# Altium PCB MIDI_Synthesizer_PCB.PcbDoc
Units mil, origin at the board's own origin, x right, y up, seen from the top; angles counter-clockwise.
Board outline 6000 x 4000 mil, 2 copper layers (Top Layer, Bottom Layer); 242 components, 179 nets, 744 pads, 0 vias.
Unrouted connection lines stored in the file: 38.
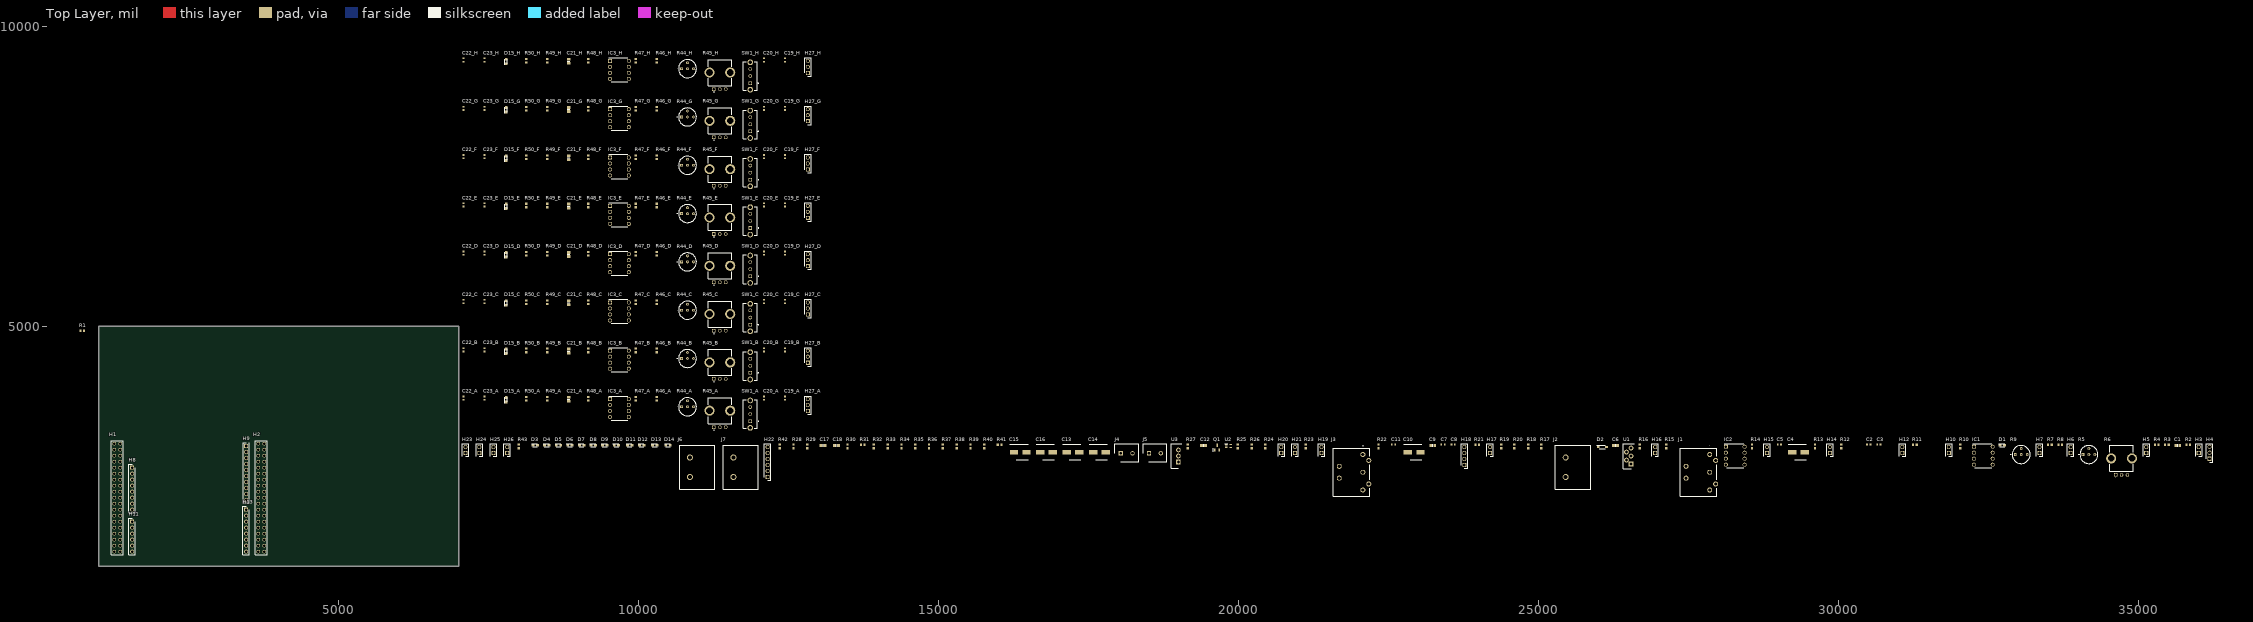
[diagram p0: Top Layer view]
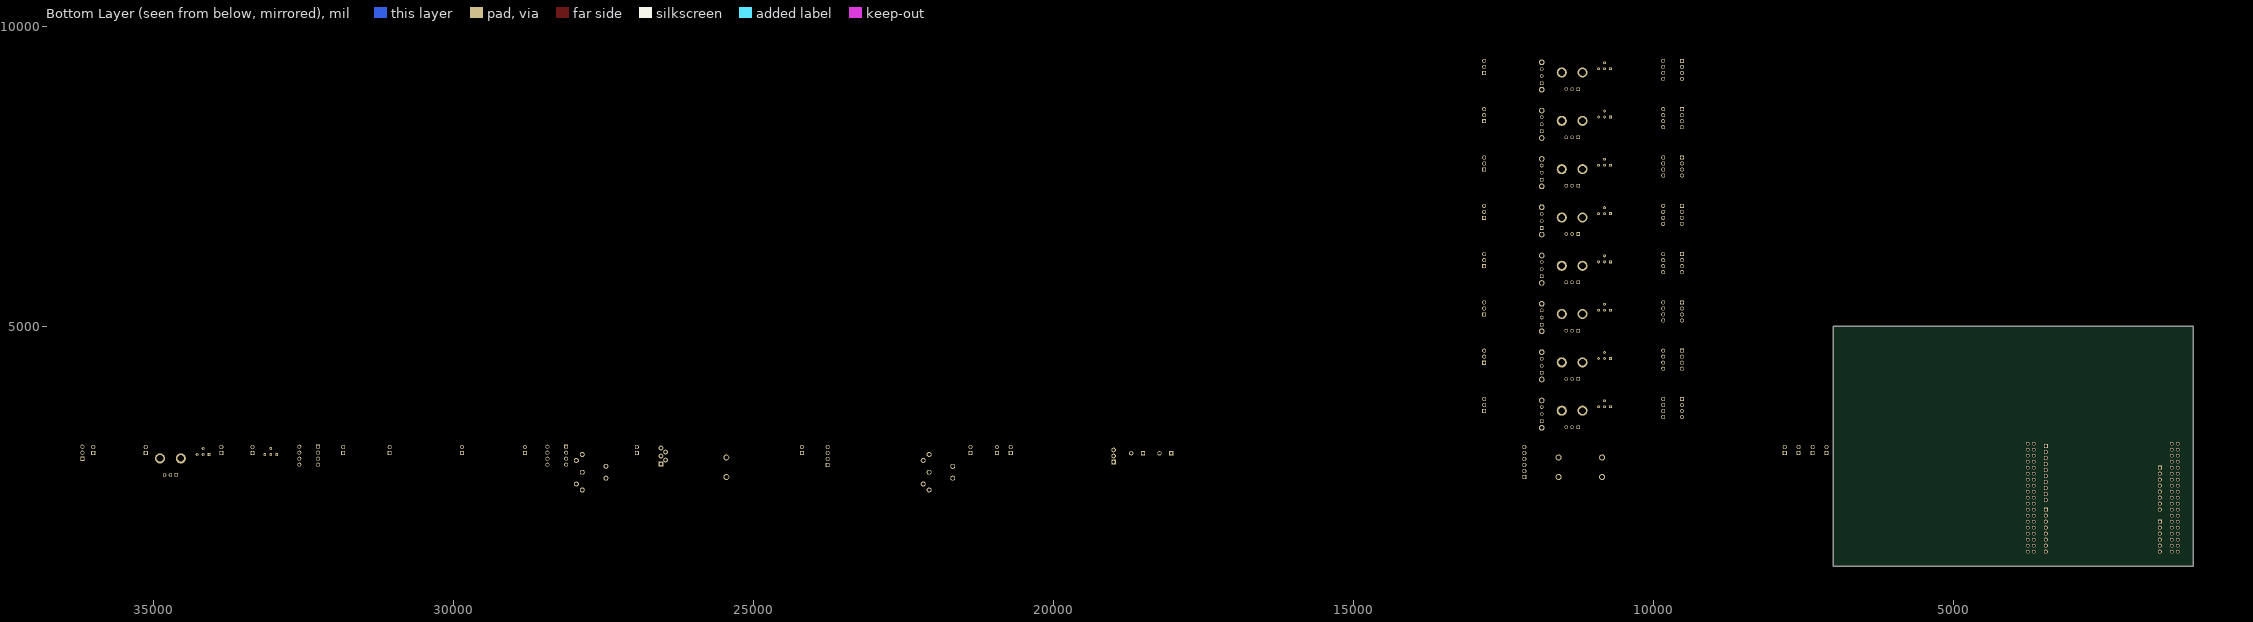
[diagram p1: Bottom Layer view, seen from below]

## Layer stack, top to bottom
Top Solder: solder mask 0.4, Solder Resist, Dk 3.5
Top Layer: signal copper 1.4
Dielectric 1: dielectric 12.6, FR-4, Dk 4.8
Bottom Layer: signal copper 1.4
Bottom Solder: solder mask 0.4, Solder Resist, Dk 3.5

## Board outline
1000,1000 7000,1000 7000,5000 1000,5000

## Design rules (kind name [scope] priority, off if disabled: settings)
Clearance [All] p1: gap=10 ignorepadtopadclearanceinfootprint=FALSE
PolygonConnect [All] p1: connectstyle=Relief reliefconductorwidth=10 reliefentries=4 polygonreliefangle="90 Angle" airgapwidth=10
RoutingVias [All] p1: holewidth=28 width=50 viastyle="Through Hole" minholewidth=28 minwidth=50 maxholewidth=28 maxwidth=50
SolderMaskExpansion [All] p1: expansion=4 istentingtop=FALSE
SupplyNets "Schematic Supply Nets_12" [InNet('3V3')] p1: voltage=0.000
SupplyNets "Schematic Supply Nets_11" [InNet('VBAT')] p2: voltage=0.000
SupplyNets "Schematic Supply Nets_10" [InNet('5V')] p3: voltage=0.000
SupplyNets "Schematic Supply Nets_9" [InNet('VIN')] p4: voltage=0.000
SupplyNets "Schematic Supply Nets_8" [InNet('AVDD')] p5: voltage=0.000
SupplyNets "Schematic Supply Nets_7" [InNet('AGND')] p6: voltage=0.000
SupplyNets "Schematic Supply Nets_6" [InNet('GND')] p7: voltage=0.000
SupplyNets "Schematic Supply Nets_5" [InNet('VBUS_STLK')] p8: voltage=0.000
SupplyNets "Schematic Supply Nets_4" [InNet('IOREF')] p9: voltage=0.000
SupplyNets "Schematic Supply Nets_3" [InNet('-15')] p10: voltage=0.000
SupplyNets "Schematic Supply Nets_2" [InNet('+15')] p11: voltage=0.000
SupplyNets "Schematic Supply Nets_1" [InNet('E5V')] p12: voltage=0.000
SupplyNets "Schematic Supply Nets" [InNet('VDD')] p13: voltage=0.000
Width [All] p1: maxlimit=10 minlimit=10 preferedwidth=10
30 further rules are at their usual default settings.

## Classes and differential pairs
component class H: C19_H C20_H C21_H C22_H C23_H D15_H H27_H IC3_H R44_H R45_H R46_H R47_H R48_H R49_H R50_H SW1_H
component class G: C19_G C20_G C21_G C22_G C23_G D15_G H27_G IC3_G R44_G R45_G R46_G R47_G R48_G R49_G R50_G SW1_G
component class F: C19_F C20_F C21_F C22_F C23_F D15_F H27_F IC3_F R44_F R45_F R46_F R47_F R48_F R49_F R50_F SW1_F
component class E: C19_E C20_E C21_E C22_E C23_E D15_E H27_E IC3_E R44_E R45_E R46_E R47_E R48_E R49_E R50_E SW1_E
component class D: C19_D C20_D C21_D C22_D C23_D D15_D H27_D IC3_D R44_D R45_D R46_D R47_D R48_D R49_D R50_D SW1_D
component class C: C19_C C20_C C21_C C22_C C23_C D15_C H27_C IC3_C R44_C R45_C R46_C R47_C R48_C R49_C R50_C SW1_C
component class B: C19_B C20_B C21_B C22_B C23_B D15_B H27_B IC3_B R44_B R45_B R46_B R47_B R48_B R49_B R50_B SW1_B
component class A: C19_A C20_A C21_A C22_A C23_A D15_A H27_A IC3_A R44_A R45_A R46_A R47_A R48_A R49_A R50_A SW1_A
channel class Low_Pass_Filter: A B C D E F G H
component class MIDI_Synthesizer: C1 C2 C3 C4 C5 C6 C7 C8 C9 C10 C11 C12 C13 C14 C15 C16 C17 C18 D1 D2 D3 D4 D5 D6 D7 D8 D9 D10 D11 D12 D13 D14 H1 H2 H3 H4 H5 H6 H7 H8 H9 H10 H11 H12 H13 H14 H15 H16 H17 H18 H19 H20 H21 H22 H23 H24 H25 H26 IC1 IC2 J1 J2 J3 J4 J5 J6 J7 Q1 R1 R2 R3 R4 R5 R6 R7 R8 R9 R10 R11 R12 R13 R14 R15 R16 R17 R18 R19 R20 R21 R22 R23 R24 R25 R26 R27 R28 R29 R30 R31 R32 R33 R34 R35 R36 R37 R38 R39 R40 R41 R42 R43 U1 U2 U3

## Components (designator, comment, footprint, x,y, rotation, side; value= is the part's Value field where it differs from the comment)
C1 "1u" CAP0805 35650,3010 r0 top
C2 "100n" CAP0603 30500,3025 r0 top
C3 "100n" CAP0603 30670,3025 r0 top
C4 "100u" CAPSMD660X800N 29330,2900 r0 top
C5 "100n" CAP0603 29010,3025 r0 top
C6 "2.2u" CAP0805 26280,3010 r0 top
C7 "100n" CAP0603 23405,3025 r0 top
C8 "100n" CAP0603 23575,3025 r0 top
C9 "0.22u" CAP0805 23235,3010 r0 top
C10 "100u" CAPSMD660X800N 22925,2900 r0 top
C11 "100n" CAP0603 22580,3025 r0 top
C12 "22u" CAP0805 19415,3010 r0 top
C13 "100u" CAPSMD660X800N 17240,2900 r0 top
C14 "100u" CAPSMD660X800N 17680,2900 r0 top
C15 "100u" CAPSMD660X800N 16360,2900 r0 top
C16 "100u" CAPSMD660X800N 16800,2900 r0 top
C17 "1u" CAP0805 13075,3010 r0 top
C18 "1u" CAP0805 13295,3010 r0 top
C19_A "22p" CAP0603 12440,3800 r90 top (schematic designator C19)
C19_B "22p" CAP0603 12440,4605 r90 top (schematic designator C19)
C19_C "22p" CAP0603 12440,5410 r90 top (schematic designator C19)
C19_D "22p" CAP0603 12440,6215 r90 top (schematic designator C19)
C19_E "22p" CAP0603 12440,7020 r90 top (schematic designator C19)
C19_F "22p" CAP0603 12440,7825 r90 top (schematic designator C19)
C19_G "22p" CAP0603 12440,8630 r90 top (schematic designator C19)
C19_H "22p" CAP0603 12440,9435 r90 top (schematic designator C19)
C20_A "820p" CAP0603 12090,3800 r90 top (schematic designator C20)
C20_B "820p" CAP0603 12090,4605 r90 top (schematic designator C20)
C20_C "820p" CAP0603 12090,5410 r90 top (schematic designator C20)
C20_D "820p" CAP0603 12090,6215 r90 top (schematic designator C20)
C20_E "820p" CAP0603 12090,7020 r90 top (schematic designator C20)
C20_F "820p" CAP0603 12090,7825 r90 top (schematic designator C20)
C20_G "820p" CAP0603 12090,8630 r90 top (schematic designator C20)
C20_H "820p" CAP0603 12090,9435 r90 top (schematic designator C20)
C21_A "1u" CAP0805 8835,3780 r90 top (schematic designator C21)
C21_B "1u" CAP0805 8835,4585 r90 top (schematic designator C21)
C21_C "1u" CAP0805 8835,5390 r90 top (schematic designator C21)
C21_D "1u" CAP0805 8835,6195 r90 top (schematic designator C21)
C21_E "1u" CAP0805 8835,7000 r90 top (schematic designator C21)
C21_F "1u" CAP0805 8835,7805 r90 top (schematic designator C21)
C21_G "1u" CAP0805 8835,8610 r90 top (schematic designator C21)
C21_H "1u" CAP0805 8835,9415 r90 top (schematic designator C21)
C22_A "100n" CAP0603 7080,3800 r90 top (schematic designator C22)
C22_B "100n" CAP0603 7080,4605 r90 top (schematic designator C22)
C22_C "100n" CAP0603 7080,5410 r90 top (schematic designator C22)
C22_D "100n" CAP0603 7080,6215 r90 top (schematic designator C22)
C22_E "100n" CAP0603 7080,7020 r90 top (schematic designator C22)
C22_F "100n" CAP0603 7080,7825 r90 top (schematic designator C22)
C22_G "100n" CAP0603 7080,8630 r90 top (schematic designator C22)
C22_H "100n" CAP0603 7080,9435 r90 top (schematic designator C22)
C23_A "100n" CAP0603 7430,3800 r90 top (schematic designator C23)
C23_B "100n" CAP0603 7430,4605 r90 top (schematic designator C23)
C23_C "100n" CAP0603 7430,5410 r90 top (schematic designator C23)
C23_D "100n" CAP0603 7430,6215 r90 top (schematic designator C23)
C23_E "100n" CAP0603 7430,7020 r90 top (schematic designator C23)
C23_F "100n" CAP0603 7430,7825 r90 top (schematic designator C23)
C23_G "100n" CAP0603 7430,8630 r90 top (schematic designator C23)
C23_H "100n" CAP0603 7430,9435 r90 top (schematic designator C23)
D1 "LED" LEDM2012X80N 32725,3015 r0 top
D2 "1N4148" SOD123 26060,2985 r0 top
D3 "LED" LEDM2012X80N 8275,3015 r0 top
D4 "LED" LEDM2012X80N 8470,3015 r0 top
D5 "LED" LEDM2012X80N 8665,3015 r0 top
D6 "LED" LEDM2012X80N 8855,3015 r0 top
D7 "LED" LEDM2012X80N 9050,3015 r0 top
D8 "LED" LEDM2012X80N 9245,3015 r0 top
D9 "LED" LEDM2012X80N 9435,3015 r0 top
D10 "LED" LEDM2012X80N 9630,3015 r0 top
D11 "LED" LEDM2012X80N 9850,3015 r0 top
D12 "LED" LEDM2012X80N 10050,3015 r0 top
D13 "LED" LEDM2012X80N 10270,3015 r0 top
D14 "LED" LEDM2012X80N 10490,3015 r0 top
D15_A "LED" LEDM2012X80N 7790,3775 r90 top (schematic designator D15)
D15_B "LED" LEDM2012X80N 7790,4580 r90 top (schematic designator D15)
D15_C "LED" LEDM2012X80N 7790,5385 r90 top (schematic designator D15)
D15_D "LED" LEDM2012X80N 7790,6190 r90 top (schematic designator D15)
D15_E "LED" LEDM2012X80N 7790,6995 r90 top (schematic designator D15)
D15_F "LED" LEDM2012X80N 7790,7800 r90 top (schematic designator D15)
D15_G "LED" LEDM2012X80N 7790,8605 r90 top (schematic designator D15)
D15_H "LED" LEDM2012X80N 7790,9410 r90 top (schematic designator D15)
H1 "Header" HEADER_2X19 1260.16,3041.57 r270 top
H2 "Header" HEADER_2X19 3660.16,3041.57 r270 top
H3 "Header" Header_1X2 36000,2885 r90 top
H4 "Header" Header_1X3 36180,2790 r90 top
H5 "Header" Header_1X2 35125,2885 r90 top
H6 "Header" Header_1X2 33865,2885 r90 top
H7 "Header" Header_1X2 33345,2885 r90 top
H8 "Header" Header_1X8 1560.16,2641.57 r270 top
H9 "Header" Header_1X10 3460.16,3001.57 r270 top
H10 "Header" Header_1X2 31835,2885 r90 top
H11 "Header" Header_1X6 1560.16,1741.57 r270 top
H12 "Header" Header_1X2 31060,2885 r90 top
H13 "Header" Header_1X8 3460.16,1941.57 r270 top
H14 "Header" Header_1X2 29855,2885 r90 top
H15 "Header" Header_1X2 28805,2885 r90 top
H16 "Header" Header_1X2 26940,2885 r90 top
H17 "Header" Header_1X2 24190,2885 r90 top
H18 "Header" Header_1X4 23760,2685 r90 top
H19 "Header" Header_1X2 21380,2885 r90 top
H20 "Header" Header_1X2 20710,2885 r90 top
H21 "Header" Header_1X2 20940,2885 r90 top
H22 "Header" Header_1X6 12150,2485 r90 top
H23 "Header" Header_1X2 7115,2885 r90 top
H24 "Header" Header_1X2 7345,2885 r90 top
H25 "Header" Header_1X2 7580,2885 r90 top
H26 "Header" Header_1X2 7810,2885 r90 top
H27_A "Header" Header_1X3 12820,3585 r90 top (schematic designator H27)
H27_B "Header" Header_1X3 12820,4390 r90 top (schematic designator H27)
H27_C "Header" Header_1X3 12820,5195 r90 top (schematic designator H27)
H27_D "Header" Header_1X3 12820,6000 r90 top (schematic designator H27)
H27_E "Header" Header_1X3 12820,6805 r90 top (schematic designator H27)
H27_F "Header" Header_1X3 12820,7610 r90 top (schematic designator H27)
H27_G "Header" Header_1X3 12820,8415 r90 top (schematic designator H27)
H27_H "Header" Header_1X3 12820,9220 r90 top (schematic designator H27)
IC1 "NE5532N" DIP8 32410,2840 r0 top
IC2 "6N138" DIP8 28275,2840 r0 top
IC3_A "NE5532N" DIP8 9680,3635 r0 top (schematic designator IC3)
IC3_B "NE5532N" DIP8 9680,4440 r0 top (schematic designator IC3)
IC3_C "NE5532N" DIP8 9680,5245 r0 top (schematic designator IC3)
IC3_D "NE5532N" DIP8 9680,6050 r0 top (schematic designator IC3)
IC3_E "NE5532N" DIP8 9680,6855 r0 top (schematic designator IC3)
IC3_F "NE5532N" DIP8 9680,7660 r0 top (schematic designator IC3)
IC3_G "NE5532N" DIP8 9680,8465 r0 top (schematic designator IC3)
IC3_H "NE5532N" DIP8 9680,9270 r0 top (schematic designator IC3)
J1 "KCDX-5S-S2" KCDX5SS2 27850,2860 r90 top
J2 "Header" "Barrier Terminal P=8.25mm" 25450,2485 r90 top
J3 "KCDX-5S-S2" KCDX5SS2 22070,2860 r90 top
J4 "691137710002" SHDR2W70P0X500_1X2_1000X750X1160P 18035,2880 r0 top
J5 "691137710002" SHDR2W70P0X500_1X2_1000X750X1160P 18505,2880 r0 top
J6 "Header" "Barrier Terminal P=8.25mm" 10855,2485 r90 top
J7 "Header" "Barrier Terminal P=8.25mm" 11580,2485 r90 top
Q1 "SI2302" SOT23 19640,2975 r0 top
R1 "10k" RESC0603 726.34,4920 r0 top
R2 "100k" RESC0603 35825,3020 r0 top
R3 "100k" RESC0603 35470,3020 r0 top
R4 "10k" RESC0603 35300,3020 r0 top
R5 "10k" Trim_Pot_Hybrid 34070,2860 r0 top
R6 "10k" PTV09A4015FB103 34615,2520 r0 top
R7 "1M" RESC0603 33520,3020 r0 top
R8 "1k" RESC0603 33690,3020 r0 top
R9 "10k" Trim_Pot_Hybrid 32940,2860 r0 top
R10 "10k" RESC0603 32025,2995 r90 top
R11 "10k" RESC0603 31270,3020 r0 top
R12 "10k" RESC0603 30045,2995 r90 top
R13 "10k" RESC0603 29605,2995 r90 top
R14 "220" RESC0603 28555,2995 r90 top
R15 "470" RESC0603 27125,2995 r90 top
R16 "0" RESC0603 26685,2995 r90 top
R17 "10k" RESC0603 25045,2995 r90 top
R18 "4.7k" RESC0603 24825,2995 r90 top
R19 "1M" RESC0603 24375,2995 r90 top
R20 "22k" RESC0603 24595,2995 r90 top
R21 "1" RESC0603 23975,3020 r0 top
R22 "220" RESC0603 22330,2995 r90 top
R23 "10k" RESC0603 21115,2995 r90 top
R24 "220" RESC0603 20445,2995 r90 top
R25 "1k" RESC0603 19985,2995 r90 top
R26 "22k" RESC0603 20215,2995 r90 top
R27 "0" RESC0603 19150,2995 r90 top
R28 "100k" RESC0603 12580,2995 r90 top
R29 "100k" RESC0603 12810,2995 r90 top
R30 "1k" RESC0603 13480,2995 r90 top
R31 "1k" RESC0603 13735,3020 r0 top
R32 "1k" RESC0603 13920,2995 r90 top
R33 "1k" RESC0603 14150,2995 r90 top
R34 "1k" RESC0603 14380,2995 r90 top
R35 "1k" RESC0603 14610,2995 r90 top
R36 "1k" RESC0603 14840,2995 r90 top
R37 "1k" RESC0603 15070,2995 r90 top
R38 "1k" RESC0603 15300,2995 r90 top
R39 "1k" RESC0603 15530,2995 r90 top
R40 "1k" RESC0603 15760,2995 r90 top
R41 "1k" RESC0603 16015,3020 r0 top
R42 "0" RESC0603 12350,2995 r90 top
R43 "0" RESC0603 8005,2995 r90 top
R44_A "10k" Trim_Pot_Hybrid 10715,3655 r0 top (schematic designator R44)
R44_B "10k" Trim_Pot_Hybrid 10715,4460 r0 top (schematic designator R44)
R44_C "10k" Trim_Pot_Hybrid 10715,5265 r0 top (schematic designator R44)
R44_D "10k" Trim_Pot_Hybrid 10715,6070 r0 top (schematic designator R44)
R44_E "10k" Trim_Pot_Hybrid 10715,6875 r0 top (schematic designator R44)
R44_F "10k" Trim_Pot_Hybrid 10715,7680 r0 top (schematic designator R44)
R44_G "10k" Trim_Pot_Hybrid 10715,8485 r0 top (schematic designator R44)
R44_H "10k" Trim_Pot_Hybrid 10715,9290 r0 top (schematic designator R44)
R45_A "10k" PTV09A4015FB103 11255,3315 r0 top (schematic designator R45)
R45_B "10k" PTV09A4015FB103 11255,4120 r0 top (schematic designator R45)
R45_C "10k" PTV09A4015FB103 11255,4925 r0 top (schematic designator R45)
R45_D "10k" PTV09A4015FB103 11255,5730 r0 top (schematic designator R45)
R45_E "10k" PTV09A4015FB103 11255,6535 r0 top (schematic designator R45)
R45_F "10k" PTV09A4015FB103 11255,7340 r0 top (schematic designator R45)
R45_G "10k" PTV09A4015FB103 11255,8145 r0 top (schematic designator R45)
R45_H "10k" PTV09A4015FB103 11255,8950 r0 top (schematic designator R45)
R46_A "1M" RESC0603 10305,3790 r90 top (schematic designator R46)
R46_B "1M" RESC0603 10305,4595 r90 top (schematic designator R46)
R46_C "1M" RESC0603 10305,5400 r90 top (schematic designator R46)
R46_D "1M" RESC0603 10305,6205 r90 top (schematic designator R46)
R46_E "1M" RESC0603 10305,7010 r90 top (schematic designator R46)
R46_F "1M" RESC0603 10305,7815 r90 top (schematic designator R46)
R46_G "1M" RESC0603 10305,8620 r90 top (schematic designator R46)
R46_H "1M" RESC0603 10305,9425 r90 top (schematic designator R46)
R47_A "10k" RESC0603 9955,3790 r90 top (schematic designator R47)
R47_B "10k" RESC0603 9955,4595 r90 top (schematic designator R47)
R47_C "10k" RESC0603 9955,5400 r90 top (schematic designator R47)
R47_D "10k" RESC0603 9955,6205 r90 top (schematic designator R47)
R47_E "10k" RESC0603 9955,7010 r90 top (schematic designator R47)
R47_F "10k" RESC0603 9955,7815 r90 top (schematic designator R47)
R47_G "10k" RESC0603 9955,8620 r90 top (schematic designator R47)
R47_H "10k" RESC0603 9955,9425 r90 top (schematic designator R47)
R48_A "3.3k" RESC0603 9160,3790 r90 top (schematic designator R48)
R48_B "3.3k" RESC0603 9160,4595 r90 top (schematic designator R48)
R48_C "3.3k" RESC0603 9160,5400 r90 top (schematic designator R48)
R48_D "3.3k" RESC0603 9160,6205 r90 top (schematic designator R48)
R48_E "3.3k" RESC0603 9160,7010 r90 top (schematic designator R48)
R48_F "3.3k" RESC0603 9160,7815 r90 top (schematic designator R48)
R48_G "3.3k" RESC0603 9160,8620 r90 top (schematic designator R48)
R48_H "3.3k" RESC0603 9160,9425 r90 top (schematic designator R48)
R49_A "10k" RESC0603 8475,3790 r90 top (schematic designator R49)
R49_B "10k" RESC0603 8475,4595 r90 top (schematic designator R49)
R49_C "10k" RESC0603 8475,5400 r90 top (schematic designator R49)
R49_D "10k" RESC0603 8475,6205 r90 top (schematic designator R49)
R49_E "10k" RESC0603 8475,7010 r90 top (schematic designator R49)
R49_F "10k" RESC0603 8475,7815 r90 top (schematic designator R49)
R49_G "10k" RESC0603 8475,8620 r90 top (schematic designator R49)
R49_H "10k" RESC0603 8475,9425 r90 top (schematic designator R49)
R50_A "3.3k" RESC0603 8125,3790 r90 top (schematic designator R50)
R50_B "3.3k" RESC0603 8125,4595 r90 top (schematic designator R50)
R50_C "3.3k" RESC0603 8125,5400 r90 top (schematic designator R50)
R50_D "3.3k" RESC0603 8125,6205 r90 top (schematic designator R50)
R50_E "3.3k" RESC0603 8125,7010 r90 top (schematic designator R50)
R50_F "3.3k" RESC0603 8125,7815 r90 top (schematic designator R50)
R50_G "3.3k" RESC0603 8125,8620 r90 top (schematic designator R50)
R50_H "3.3k" RESC0603 8125,9425 r90 top (schematic designator R50)
SW1_A "Slide Switch 4" SLW126894AND 11860,3415 r90 top (schematic designator SW1)
SW1_B "Slide Switch 4" SLW126894AND 11860,4220 r90 top (schematic designator SW1)
SW1_C "Slide Switch 4" SLW126894AND 11860,5025 r90 top (schematic designator SW1)
SW1_D "Slide Switch 4" SLW126894AND 11860,5830 r90 top (schematic designator SW1)
SW1_E "Slide Switch 4" SLW126894AND 11860,6635 r90 top (schematic designator SW1)
SW1_F "Slide Switch 4" SLW126894AND 11860,7440 r90 top (schematic designator SW1)
SW1_G "Slide Switch 4" SLW126894AND 11860,8245 r90 top (schematic designator SW1)
SW1_H "Slide Switch 4" SLW126894AND 11860,9050 r90 top (schematic designator SW1)
U1 "LM1875T" TO-220-5 26540,2700 r90 top
U2 "SN74AHC1G14DCKR" SC70-5 19830,3000 r0 top
U3 "LM7805CT" TO-220-3 18995,2735 r90 top

## Footprints (in the part's own frame and the unit in brackets; to place one, negate y for a bottom-side part, rotate by r counter-clockwise, add the part's x,y. Pads: shape width x height; smd on the part's side, far side on the other; paste and mask are expansions set on the pad)
"Barrier Terminal P=8.25mm" [mm]
  round 2.55 hole 1.7: 1(0,0) 2(8.25,0)
  silkscreen extent -5.1,-10.6 13.35,4.4, body extent -5.1,-10.6 13.35,4.4, height 12.9
CAP0603 [mm]
  rect 0.73x0.94 smd: 1(-0.71,0) 2(0.71,0)
  body extent -0.8,-0.4 0.8,0.4, height 0.9
CAP0805 [mm] "Chip Capacitor, 2-Leads, Body 2.00x1.20mm, IPC Medium Density"
  rect 1.2x1.45 smd: 1(-0.85,0) 2(0.85,0)
  silkscreen extent 0,-0.53 0,0.53, body extent -1,-0.63 1,0.63, height 1.1
CAPSMD660X800N [mm]
  rect 3.55x1.85 smd: 1(-2.65,0) 2(2.65,0)
  silkscreen extent -4.43,-3.3 3.3,3.3, body extent -3.7,-3.4 3.7,3.4, height 8
DIP8 [mm]
  rect 1.7x1.7 hole 1.15: 1(-3.97,3.81)
  round 1.7 hole 1.15: 2(-3.97,1.27) 3(-3.97,-1.27) 4(-3.97,-3.81) 5(3.97,-3.81) 6(3.97,-1.27) 7(3.97,1.27) 8(3.97,3.81)
  silkscreen extent -4.55,-5.08 3.55,5.08, body extent -4.11,-4.79 4.11,4.79, height 5.33
Header_1X2 [mm]
  rect 1.725x1.725 hole 1.15: 1(0,0)
  round 1.725 hole 1.15: 2(2.54,0)
  silkscreen extent -1.42,-1.38 3.95,1.37
Header_1X3 [mm]
  rect 1.725x1.725 hole 1.15: 1(0,0)
  round 1.725 hole 1.15: 2(2.54,0) 3(5.08,0)
  silkscreen extent -1.42,-1.37 6.35,1.37
Header_1X4 [mm]
  rect 1.725x1.725 hole 1.15: 1(0,0)
  round 1.725 hole 1.15: 2(2.54,0) 3(5.08,0) 4(7.62,0)
  silkscreen extent -1.42,-1.37 9.04,1.37
Header_1X6 [mm]
  rect 1.725x1.725 hole 1.15: 1(0,0)
  round 1.725 hole 1.15: 2(2.54,0) 3(5.08,0) 4(7.62,0) 5(10.16,0) 6(12.7,0)
  silkscreen extent -1.42,-1.37 14.1,1.37
Header_1X8 [mm]
  rect 1.725x1.725 hole 1.15: 1(0,0)
  round 1.725 hole 1.15: 2(2.54,0) 3(5.08,0) 4(7.62,0) 5(10.16,0) 6(12.7,0) 7(15.24,0) 8(17.78,0)
  silkscreen extent -1.42,-1.37 19.18,1.37
Header_1X10 [mm]
  rect 1.725x1.725 hole 1.15: 1(0,0)
  round 1.725 hole 1.15: 2(2.54,0) 3(5.08,0) 4(7.62,0) 5(10.16,0) 6(12.7,0) 7(15.24,0) 8(17.78,0) 9(20.32,0) 10(22.86,0)
  silkscreen extent -1.42,-1.37 24.1,1.37
HEADER_2X19 [mm]
  round 1.53 hole 1.02: 1(0,0) 2(0,2.54) 3(2.54,0) 4(2.54,2.54) 5(5.08,0) 6(5.08,2.54) 7(7.62,0) 8(7.62,2.54) 9(10.16,0) 10(10.16,2.54) 11(12.7,0) 12(12.7,2.54) 13(15.24,0) 14(15.24,2.54) 15(17.78,0) 16(17.78,2.54) 17(20.32,0) 18(20.32,2.54) 19(22.86,0) 20(22.86,2.54) 21(25.4,0) 22(25.4,2.54) 23(27.94,0) 24(27.94,2.54) 25(30.48,0) 26(30.48,2.54) 27(33.02,0) 28(33.02,2.54) 29(35.56,0) 30(35.56,2.54) 31(38.1,0) 32(38.1,2.54) 33(40.64,0) 34(40.64,2.54) 35(43.18,0) 36(43.18,2.54) 37(45.72,0) 38(45.72,2.54)
  silkscreen extent -1.27,-1.27 46.99,3.81, body extent -1.27,-1.27 46.99,3.81, height 8.61
KCDX5SS2 [mm]
  round 2.1 hole 1.4: 1(0,0) 2(-7.5,0) 3(-15,0) 4(-2.5,-2.5) 5(-12.5,-2.5) MH1(-5,10) MH2(-10,10)
  silkscreen extent -17.75,-3 3.8,12.5, body extent -17.75,-3.1 2.75,12.5, height 21.3
LEDM2012X80N [mm]
  rect 1.2x1.05 smd: 1(-0.95,0) 2(0.95,0)
  silkscreen extent -1.48,-0.63 1,0.63, body extent -1,-0.63 1,0.63, height 0.7
PTV09A4015FB103 [mm]
  rect 1.5x1.5 hole 1: 1(0,0)
  round 1.5 hole 1: 2(2.5,0) 3(5,0)
  round 4.26 hole 2.84: 4(-1.9,7) 5(6.9,7)
  silkscreen extent -2.5,-1.3 7.5,12.5, body extent -3.2,-0.18 8.2,12.42, height 15.67
RESC0603 [mm]
  rect 0.9x1 smd: 1(-0.75,0) 2(0.75,0)
  body extent -0.77,-0.4 0.78,0.4, height 0.45
SC70-5 [mm]
  rect 1.2x0.4 smd: 1(-0.95,0.65) 2(-0.95,0) 3(-0.95,-0.65) 4(0.95,-0.65) 5(0.95,0.65)
  silkscreen extent -1.55,1.1 -0.35,1.1, body extent -1.05,-1.08 1.05,1.07, height 0.95
SHDR2W70P0X500_1X2_1000X750X1160P [mm]
  rect 1.8x1.8 hole 1.2: 1(0,0)
  round 1.8 hole 1.2: 2(5,0)
  silkscreen extent -2.5,-3.5 7.6,4.1, body extent -2.45,-3.45 7.55,4.05, height 11.5
SLW126894AND [mm]
  rect 1.515x1.515 hole 1.01: 1(0,0)
  round 1.515 hole 1.01: 2(3,0) 3(6,0)
  round 2.385 hole 1.59: 4(-2.8,0) 5(8.8,0)
  silkscreen extent -3.05,-3.5 9.05,2.9, body extent -3.05,-2.9 9.05,2.9, height 10.06
SOD123 [mm]
  rect 1.15x0.75 smd: 1(-1.75,0) 2(1.75,0)
  silkscreen extent -2.32,-0.77 1.35,0.77, body extent -1.85,-0.77 1.85,0.77, height 1.35
SOT23 [mm]
  rect 0.65x1.35 smd: 1(-0.96,-1) 2(0.96,-1) 3(0,1)
  silkscreen extent -1.54,-1.68 -1.54,-0.33, body extent -1.45,-1.2 1.45,1.2, height 0.95
TO-220-3 [mm]
  rect 1.98x1.98 hole 1.32: 1(0,0)
  round 1.98 hole 1.32: 2(2.55,0) 3(5.1,0)
  silkscreen extent -2.65,-1.53 7.75,3.07, body extent -2.55,-1.53 7.65,3.07, height 19.22
TO-220-5 [mm]
  rect 2.025x2.025 hole 1.35: 1(0,0)
  round 2.025 hole 1.35: 2(1.7,2) 3(3.4,0) 4(5.1,2) 5(6.8,0)
  silkscreen extent -1.87,-1.42 8.67,3.28, body extent -1.68,-1.42 8.48,3.28, height 17.61
Trim_Pot_Hybrid [mm]
  rect 1.155x1.155 hole 0.63: 1(0,0)
  round 1.155 hole 0.63: 2(2.54,0) 2(2.54,2.54) 3(5.08,0)
  silkscreen extent -1.86,-3.81 6.35,3.81, body extent -1.27,-3.81 6.35,3.81, height 6.42

## Part data
C1 C2 C3 C5 C7 C8 C11 C17 C18 C19_A C19_B C19_C C19_D C19_E C19_F C19_G C19_H C20_A C20_B C20_C C20_D C20_E C20_F C20_G C20_H C21_A C21_B C21_C C21_D C21_E C21_F C21_G C21_H C22_A C22_B C22_C C22_D C22_E C22_F C22_G C22_H C23_A C23_B C23_C C23_D C23_E C23_F C23_G C23_H: library part "Capacitor - Non Polarized", "Non Polarized Capacitor"
C4 C6 C9 C10 C12 C13 C14 C15 C16: library part "Capacitor - Polarized", "Polarized Capacitor"
D1 D3 D4 D5 D6 D7 D8 D9 D10 D11 D12 D13 D14 D15_A D15_B D15_C D15_D D15_E D15_F D15_G D15_H: "General Purpose LED", ComponentLink1Description=Datasheet, ComponentLink1URL=https://www.smc-diodes.com/propdf/1N4148W%20N0571%20REV.E.pdf
D2: "1N4148 General Purpose Switching Diode", ComponentLink1Description=Datasheet, ComponentLink1URL=https://www.smc-diodes.com/propdf/1N4148W%20N0571%20REV.E.pdf
H1 H2: library part "38-Pin Header (19x2)", "38-Pin 2 Row Header"
H3 H5 H6 H7 H10 H12 H14 H15 H16 H17 H19 H20 H21 H23 H24 H25 H26: library part "2-Pin Header", "2-Pin Header"
H4 H27_A H27_B H27_C H27_D H27_E H27_F H27_G H27_H: library part "3-Pin Header", "3-Pin Header"
H8 H13: library part "8-Pin Header", "8-Pin Header"
H9: library part "10-Pin Header", "10-Pin Header"
H11 H22: library part "6-Pin Header", "6-Pin Header"
H18: library part "4-Pin Header", "4-Pin Header"
IC1 IC3_A IC3_B IC3_C IC3_D IC3_E IC3_F IC3_G IC3_H: "Integrated Circuit", Manufacturer_Name=onsemi, Mouser Part Number=863-NE5532N, Datasheet Link=http://www.onsemi.com/pub/Collateral/NE5532-D.PDF, Height=5.33mm, Manufacturer_Part_Number=NE5532N, Mouser Price/Stock=https://www.mouser.co.uk/ProductDetail/onsemi/NE5532N?qs=8sOby8ZxZLFYqQ84pMQPGQ%3D%3D
IC2: "Integrated Circuit", Manufacturer_Name=Vishay, Mouser Part Number=782-6N138, Arrow Part Number=6N138, Arrow Price/Stock=https://www.arrow.com/en/products/6n138/vishay, Datasheet Link=https://componentsearchengine.com/Datasheets/2/6N138.pdf, Height=4.8mm, Manufacturer_Part_Number=6N138, Mouser Price/Stock=https://www.mouser.co.uk/ProductDetail/Vishay-Semiconductors/6N138?qs=IOh0O5QtZ922Jk5VFSbX4w%3D%3D
J1 J3: "Connector", Manufacturer_Name=Kycon, Mouser Part Number=806-KCDX-5S-S2, Datasheet Link=http://www.kycon.com/Pub_Eng_Draw/KCDX-5S-S2.pdf, Height=21.2mm, Manufacturer_Part_Number=KCDX-5S-S2, Mouser Price/Stock=https://www.mouser.co.uk/ProductDetail/Kycon/KCDX-5S-S2?qs=Hyo%2FOIDW0pNotQHJom5wpw%3D%3D
J2 J6 J7: library part "2-Pin Barrier Terminal", "2-Pin Terminal Block"
J4 J5: "Connector", Manufacturer_Name="Wurth Elektronik", Mouser Part Number=710-691137710002, Datasheet Link=https://katalog.we-online.com/em/datasheet/691137710002.pdf, Height=11.6mm, Manufacturer_Part_Number=691137710002, Mouser Price/Stock=https://www.mouser.co.uk/ProductDetail/Wurth-Elektronik/691137710002?qs=lBTPRtX1sU9LnHBbviNKGA%3D%3D
Q1: "General Purpose N-Channel MOSFET", ComponentLink1Description=Datasheet, ComponentLink1URL=https://www.mccsemi.com/pdf/Products/BSS138(SOT-23).pdf
R1 R2 R3 R4 R7 R8 R10 R11 R12 R13 R14 R15 R16 R17 R18 R19 R20 R21 R22 R23 R24 R25 R26 R27 R28 R29 R30 R31 R32 R33 R34 R35 R36 R37 R38 R39 R40 R41 R42 R43 R46_A R46_B R46_C R46_D R46_E R46_F R46_G R46_H R47_A R47_B R47_C R47_D R47_E R47_F R47_G R47_H R48_A R48_B R48_C R48_D R48_E R48_F R48_G R48_H R49_A R49_B R49_C R49_D R49_E R49_F R49_G R49_H R50_A R50_B R50_C R50_D R50_E R50_F R50_G R50_H: library part Resistor, "Resistor"
R5 R9 R44_A R44_B R44_C R44_D R44_E R44_F R44_G R44_H: library part Potentiometer, "Potentionmeter"
R6 R45_A R45_B R45_C R45_D R45_E R45_F R45_G R45_H: library part Potentiometer_Mounted, "Potentionmeter"
SW1_A SW1_B SW1_C SW1_D SW1_E SW1_F SW1_G SW1_H: "Slide Switch"
U1: "Integrated Circuit", Arrow Part Number=LM1875T/NOPB, Manufacturer_Name="Texas Instruments", Mouser Part Number=926-LM1875T/NOPB, Arrow Price/Stock=https://www.arrow.com/en/products/lm1875tnopb/texas-instruments?region=europe, Datasheet Link=https://datasheet.lcsc.com/szlcsc/Texas-Instruments-TI-LM1875T-NOPB_C9666.pdf, Height=4.7mm, Manufacturer_Part_Number=LM1875T/NOPB, Mouser Price/Stock=https://www.mouser.co.uk/ProductDetail/Texas-Instruments/LM1875T-NOPB?qs=X1J7HmVL2ZFo7ifmvYS%252B%252Bw%3D%3D
U2: "Integrated Circuit", Manufacturer_Name="Texas Instruments", Mouser Part Number=595-SN74AHC1G14DCKR, Arrow Part Number=SN74AHC1G14DCKR, Arrow Price/Stock=https://www.arrow.com/en/products/sn74ahc1g14dckr/texas-instruments?utm_currency=USD&region=nac, Datasheet Link=http://www.ti.com/lit/ds/symlink/sn74ahc1g14.pdf, Height=1.1mm, Manufacturer_Part_Number=SN74AHC1G14DCKR, Mouser Price/Stock=https://www.mouser.co.uk/ProductDetail/Texas-Instruments/SN74AHC1G14DCKR?qs=YhsVCygOPE3cGMcDGKIISg%3D%3D
U3: "Integrated Circuit", Manufacturer_Name="Texas Instruments", Mouser Part Number=926-LM7805CT, Arrow Part Number=LM7805CT, Arrow Price/Stock=https://www.arrow.com/en/products/lm7805ct/texas-instruments?region=europe, Datasheet Link=http://www.ti.com/lit/ds/symlink/lm340.pdf, Height=4.7mm, Manufacturer_Part_Number=LM7805CT, Mouser Price/Stock=https://www.mouser.co.uk/ProductDetail/Texas-Instruments/LM7805CT?qs=QbsRYf82W3EaqXeMDVwIfQ%3D%3D

## Nets (pads, with @x,y where several pads share a name; then routed paths per layer and width w, separated by ;. In a path a pad name is that pad's centre, name@x,y a point inside that pad or via, vN(x,y) a via of type N, cw(c..) or ccw(c..) an arc to the next point about the centre after c; other vN are vias at no path point)
3V3: H1.16 H8.4
5V: H1.18 H8.5
+15: 
-15: 
AGND: H2.32
AVDD: H2.7 H9.3
BOOT0: H1.7
E5V: H1.6
GND: H1.8 H1.19 H1.20 H1.22 H2.9 H2.20 H8.6 H8.7 H9.4
IOREF: H1.12 H8.2
MASTER_OUT: 
MIXER_OUT: 
NetC1_2: 
NetC6_2: 
NetC9_1: 
NetC12_1: 
NetC19_A_1: 
NetC19_A_2: 
NetC19_B_1: 
NetC19_B_2: 
NetC19_C_1: 
NetC19_C_2: 
NetC19_D_1: 
NetC19_D_2: 
NetC19_E_1: 
NetC19_E_2: 
NetC19_F_1: 
NetC19_F_2: 
NetC19_G_1: 
NetC19_G_2: 
NetC19_H_1: 
NetC19_H_2: 
NetC20_A_1: 
NetC20_B_1: 
NetC20_C_1: 
NetC20_D_1: 
NetC20_E_1: 
NetC20_F_1: 
NetC20_G_1: 
NetC20_H_1: 
NetC21_A_2: 
NetC21_B_2: 
NetC21_C_2: 
NetC21_D_2: 
NetC21_E_2: 
NetC21_F_2: 
NetC21_G_2: 
NetC21_H_2: 
NetD1_2: 
NetD2_1: 
NetD2_2: 
NetD3_2: 
NetD4_2: 
NetD5_2: 
NetD6_2: 
NetD7_2: 
NetD8_2: 
NetD9_2: 
NetD10_2: 
NetD11_2: 
NetD12_2: 
NetD13_2: 
NetD14_2: 
NetD15_A_2: 
NetD15_B_2: 
NetD15_C_2: 
NetD15_D_2: 
NetD15_E_2: 
NetD15_F_2: 
NetD15_G_2: 
NetD15_H_2: 
NetH4_1: 
NetH4_3: 
NetH16_1: 
NetH18_2: 
NetH18_3: 
NetH19_1: 
NetH19_2: 
NetH21_1: 
NetH22_2: 
NetH22_3: 
NetH27_A_1: 
NetH27_A_2: 
NetH27_A_3: 
NetH27_B_1: 
NetH27_B_2: 
NetH27_B_3: 
NetH27_C_1: 
NetH27_C_2: 
NetH27_C_3: 
NetH27_D_1: 
NetH27_D_2: 
NetH27_D_3: 
NetH27_E_1: 
NetH27_E_2: 
NetH27_E_3: 
NetH27_F_1: 
NetH27_F_2: 
NetH27_F_3: 
NetH27_G_1: 
NetH27_G_2: 
NetH27_G_3: 
NetH27_H_1: 
NetH27_H_2: 
NetH27_H_3: 
NetIC1_5: 
NetIC1_6: 
NetIC2_7: 
NetIC3_A_2: 
NetIC3_A_6: 
NetIC3_B_2: 
NetIC3_B_6: 
NetIC3_C_2: 
NetIC3_C_6: 
NetIC3_D_2: 
NetIC3_D_6: 
NetIC3_E_2: 
NetIC3_E_6: 
NetIC3_F_2: 
NetIC3_F_6: 
NetIC3_G_2: 
NetIC3_G_6: 
NetIC3_H_2: 
NetIC3_H_6: 
NetQ1_1: 
NetQ1_3: 
NetR25_2: 
PA0: H1.28 H11.1
PA1: H1.30 H11.2
PA5: H2.11 H9.5
PA6: H2.13 H9.6
PA7: H2.15 H9.7
PA8: H2.23 H13.1
PA9: H2.2
PA10: H2.4
PA11: H2.14
PA12: H2.12
PA13: H1.13
PA14: H1.15
PA15: H1.17
PB0: H1.34 H11.4
PB1: H1.32 H11.3
PB2: H2.22
PB3: H2.31 H13.5
PB4: H2.27 H13.3
PB5: H2.29 H13.4
PB6: H2.3 H9.1
PB7: H2.5 H9.2
PB8: H2.36
PB10: H2.25 H13.2
PB12: H2.16
PB13: H2.30
PB14: H2.28 H2.35 H13.7
PB15: H2.26 H2.37 H13.8
PC0: H1.38 H11.6
PC1: H1.36 H11.5
PC2: H1.35
PC3: H1.37
PC4: H2.34
PC5: H2.6
PC6: H2.19 H9.9
PC7: H2.21 H9.10
PC8: H2.33 H13.6
PC9: H2.17 H9.8
PC10: H1.1
PC11: H1.2
PC12: H1.3
PC13: H1.23
PC14: H1.25
PC15: H1.27
PD2: H1.4
PF0: H1.29
PF1: H1.31
SPEAKER_OUT: 
T_NRST: H1.14 H8.3
VBAT: H1.33
VBUS_STLK: H2.8
VDD: H1.5
VIN: H1.24 H8.8
pads on no net: C1.1 C1.2 C2.1 C2.2 C3.1 C3.2 C4.1 C4.2 C5.1 C5.2 C6.1 C6.2 C7.1 C7.2 C8.1 C8.2 C9.1 C9.2 C10.1 C10.2 C11.1 C11.2 C12.1 C12.2 C13.1 C13.2 C14.1 C14.2 C15.1 C15.2 C16.1 C16.2 C17.1 C17.2 C18.1 C18.2 C19_A.1 C19_A.2 C19_B.1 C19_B.2 C19_C.1 C19_C.2 C19_D.1 C19_D.2 C19_E.1 C19_E.2 C19_F.1 C19_F.2 C19_G.1 C19_G.2 C19_H.1 C19_H.2 C20_A.1 C20_A.2 C20_B.1 C20_B.2 C20_C.1 C20_C.2 C20_D.1 C20_D.2 C20_E.1 C20_E.2 C20_F.1 C20_F.2 C20_G.1 C20_G.2 C20_H.1 C20_H.2 C21_A.1 C21_A.2 C21_B.1 C21_B.2 C21_C.1 C21_C.2 C21_D.1 C21_D.2 C21_E.1 C21_E.2 C21_F.1 C21_F.2 C21_G.1 C21_G.2 C21_H.1 C21_H.2 C22_A.1 C22_A.2 C22_B.1 C22_B.2 C22_C.1 C22_C.2 C22_D.1 C22_D.2 C22_E.1 C22_E.2 C22_F.1 C22_F.2 C22_G.1 C22_G.2 C22_H.1 C22_H.2 C23_A.1 C23_A.2 C23_B.1 C23_B.2 C23_C.1 C23_C.2 C23_D.1 C23_D.2 C23_E.1 C23_E.2 C23_F.1 C23_F.2 C23_G.1 C23_G.2 C23_H.1 C23_H.2 D1.1 D1.2 D2.1 D2.2 D3.1 D3.2 D4.1 D4.2 D5.1 D5.2 D6.1 D6.2 D7.1 D7.2 D8.1 D8.2 D9.1 D9.2 D10.1 D10.2 D11.1 D11.2 D12.1 D12.2 D13.1 D13.2 D14.1 D14.2 D15_A.1 D15_A.2 D15_B.1 D15_B.2 D15_C.1 D15_C.2 D15_D.1 D15_D.2 D15_E.1 D15_E.2 D15_F.1 D15_F.2 D15_G.1 D15_G.2 D15_H.1 D15_H.2 H1.9 H1.10 H1.11 H1.21 H1.26 H2.1 H2.10 H2.18 H2.24 H2.38 H3.1 H3.2 H4.1 H4.2 H4.3 H5.1 H5.2 H6.1 H6.2 H7.1 H7.2 H8.1 H10.1 H10.2 H12.1 H12.2 H14.1 H14.2 H15.1 H15.2 H16.1 H16.2 H17.1 H17.2 H18.1 H18.2 H18.3 H18.4 H19.1 H19.2 H20.1 H20.2 H21.1 H21.2 H22.1 H22.2 H22.3 H22.4 H22.5 H22.6 H23.1 H23.2 H24.1 H24.2 H25.1 H25.2 H26.1 H26.2 H27_A.1 H27_A.2 H27_A.3 H27_B.1 H27_B.2 H27_B.3 H27_C.1 H27_C.2 H27_C.3 H27_D.1 H27_D.2 H27_D.3 H27_E.1 H27_E.2 H27_E.3 H27_F.1 H27_F.2 H27_F.3 H27_G.1 H27_G.2 H27_G.3 H27_H.1 H27_H.2 H27_H.3 IC1.1 IC1.2 IC1.3 IC1.4 IC1.5 IC1.6 IC1.7 IC1.8 IC2.1 IC2.2 IC2.3 IC2.4 IC2.5 IC2.6 IC2.7 IC2.8 IC3_A.1 IC3_A.2 IC3_A.3 IC3_A.4 IC3_A.5 IC3_A.6 IC3_A.7 IC3_A.8 IC3_B.1 IC3_B.2 IC3_B.3 IC3_B.4 IC3_B.5 IC3_B.6 IC3_B.7 IC3_B.8 IC3_C.1 IC3_C.2 IC3_C.3 IC3_C.4 IC3_C.5 IC3_C.6 IC3_C.7 IC3_C.8 IC3_D.1 IC3_D.2 IC3_D.3 IC3_D.4 IC3_D.5 IC3_D.6 IC3_D.7 IC3_D.8 IC3_E.1 IC3_E.2 IC3_E.3 IC3_E.4 IC3_E.5 IC3_E.6 IC3_E.7 IC3_E.8 IC3_F.1 IC3_F.2 IC3_F.3 IC3_F.4 IC3_F.5 IC3_F.6 IC3_F.7 IC3_F.8 IC3_G.1 IC3_G.2 IC3_G.3 IC3_G.4 IC3_G.5 IC3_G.6 IC3_G.7 IC3_G.8 IC3_H.1 IC3_H.2 IC3_H.3 IC3_H.4 IC3_H.5 IC3_H.6 IC3_H.7 IC3_H.8 J1.1 J1.2 J1.3 J1.4 J1.5 J1.MH1 J1.MH2 J2.1 J2.2 J3.1 J3.2 J3.3 J3.4 J3.5 J3.MH1 J3.MH2 J4.1 J4.2 J5.1 J5.2 J6.1 J6.2 J7.1 J7.2 Q1.1 Q1.2 Q1.3 R1.1 R1.2 R2.1 R2.2 R3.1 R3.2 R4.1 R4.2 R5.1 R5.2 R5.3 R6.1 R6.2 R6.3 R6.4 R6.5 R7.1 R7.2 R8.1 R8.2 R9.1 R9.2 R9.3 R10.1 R10.2 R11.1 R11.2 R12.1 R12.2 R13.1 R13.2 R14.1 R14.2 R15.1 R15.2 R16.1 R16.2 R17.1 R17.2 R18.1 R18.2 R19.1 R19.2 R20.1 R20.2 R21.1 R21.2 R22.1 R22.2 R23.1 R23.2 R24.1 R24.2 R25.1 R25.2 R26.1 R26.2 R27.1 R27.2 R28.1 R28.2 R29.1 R29.2 R30.1 R30.2 R31.1 R31.2 R32.1 R32.2 R33.1 R33.2 R34.1 R34.2 R35.1 R35.2 R36.1 R36.2 R37.1 R37.2 R38.1 R38.2 R39.1 R39.2 R40.1 R40.2 R41.1 R41.2 R42.1 R42.2 R43.1 R43.2 R44_A.1 R44_A.2 R44_A.3 R44_B.1 R44_B.2 R44_B.3 R44_C.1 R44_C.2 R44_C.3 R44_D.1 R44_D.2 R44_D.3 R44_E.1 R44_E.2 R44_E.3 R44_F.1 R44_F.2 R44_F.3 R44_G.1 R44_G.2 R44_G.3 R44_H.1 R44_H.2 R44_H.3 R45_A.1 R45_A.2 R45_A.3 R45_A.4 R45_A.5 R45_B.1 R45_B.2 R45_B.3 R45_B.4 R45_B.5 R45_C.1 R45_C.2 R45_C.3 R45_C.4 R45_C.5 R45_D.1 R45_D.2 R45_D.3 R45_D.4 R45_D.5 R45_E.1 R45_E.2 R45_E.3 R45_E.4 R45_E.5 R45_F.1 R45_F.2 R45_F.3 R45_F.4 R45_F.5 R45_G.1 R45_G.2 R45_G.3 R45_G.4 R45_G.5 R45_H.1 R45_H.2 R45_H.3 R45_H.4 R45_H.5 R46_A.1 R46_A.2 R46_B.1 R46_B.2 R46_C.1 R46_C.2 R46_D.1 R46_D.2 R46_E.1 R46_E.2 R46_F.1 R46_F.2 R46_G.1 R46_G.2 R46_H.1 R46_H.2 R47_A.1 R47_A.2 R47_B.1 R47_B.2 R47_C.1 R47_C.2 R47_D.1 R47_D.2 R47_E.1 R47_E.2 R47_F.1 R47_F.2 R47_G.1 R47_G.2 R47_H.1 R47_H.2 R48_A.1 R48_A.2 R48_B.1 R48_B.2 R48_C.1 R48_C.2 R48_D.1 R48_D.2 R48_E.1 R48_E.2 R48_F.1 R48_F.2 R48_G.1 R48_G.2 R48_H.1 R48_H.2 R49_A.1 R49_A.2 R49_B.1 R49_B.2 R49_C.1 R49_C.2 R49_D.1 R49_D.2 R49_E.1 R49_E.2 R49_F.1 R49_F.2 R49_G.1 R49_G.2 R49_H.1 R49_H.2 R50_A.1 R50_A.2 R50_B.1 R50_B.2 R50_C.1 R50_C.2 R50_D.1 R50_D.2 R50_E.1 R50_E.2 R50_F.1 R50_F.2 R50_G.1 R50_G.2 R50_H.1 R50_H.2 SW1_A.1 SW1_A.2 SW1_A.3 SW1_A.4 SW1_A.5 SW1_B.1 SW1_B.2 SW1_B.3 SW1_B.4 SW1_B.5 SW1_C.1 SW1_C.2 SW1_C.3 SW1_C.4 SW1_C.5 SW1_D.1 SW1_D.2 SW1_D.3 SW1_D.4 SW1_D.5 SW1_E.1 SW1_E.2 SW1_E.3 SW1_E.4 SW1_E.5 SW1_F.1 SW1_F.2 SW1_F.3 SW1_F.4 SW1_F.5 SW1_G.1 SW1_G.2 SW1_G.3 SW1_G.4 SW1_G.5 SW1_H.1 SW1_H.2 SW1_H.3 SW1_H.4 SW1_H.5 U1.1 U1.2 U1.3 U1.4 U1.5 U2.1 U2.2 U2.3 U2.4 U2.5 U3.1 U3.2 U3.3

## Silkscreen, mask and mechanical layers (free items; w line width, h text height)
Mechanical 1:
  lines w3.94: 3042.19,1122.27 3809.91,1122.27 ccw(c3809.91,1201.01) 3888.65,1201.01 3888.65,3326.99 3888.65,4212.82 ; 3042.19,1122.27 3042.19,1122.27 ; 3042.19,1122.27 2963.45,1043.53 1664.24,1043.53 1585.5,1122.27 1211.48,1122.27 cw(c1211.48,1201.01) 1132.74,1201.01 1132.74,3326.99 1132.74,4212.82 cw(c1211.48,4212.82) 1211.48,4291.56 3809.91,4291.56 cw(c3809.91,4212.82) 3888.65,4212.82 ; 3888.65,4212.82 3888.65,4212.82